# Altium PCB RDdengkuan - 副本 - 副本.PcbDoc (part 2 of 2)
Units mm, origin at the board's own origin, x right, y up, seen from the top; angles counter-clockwise.
Board outline 99.8 x 100 mm, 4 copper layers (Top Layer, VCC, GND, Bottom Layer); 147 components, 96 nets, 586 pads, 184 vias.
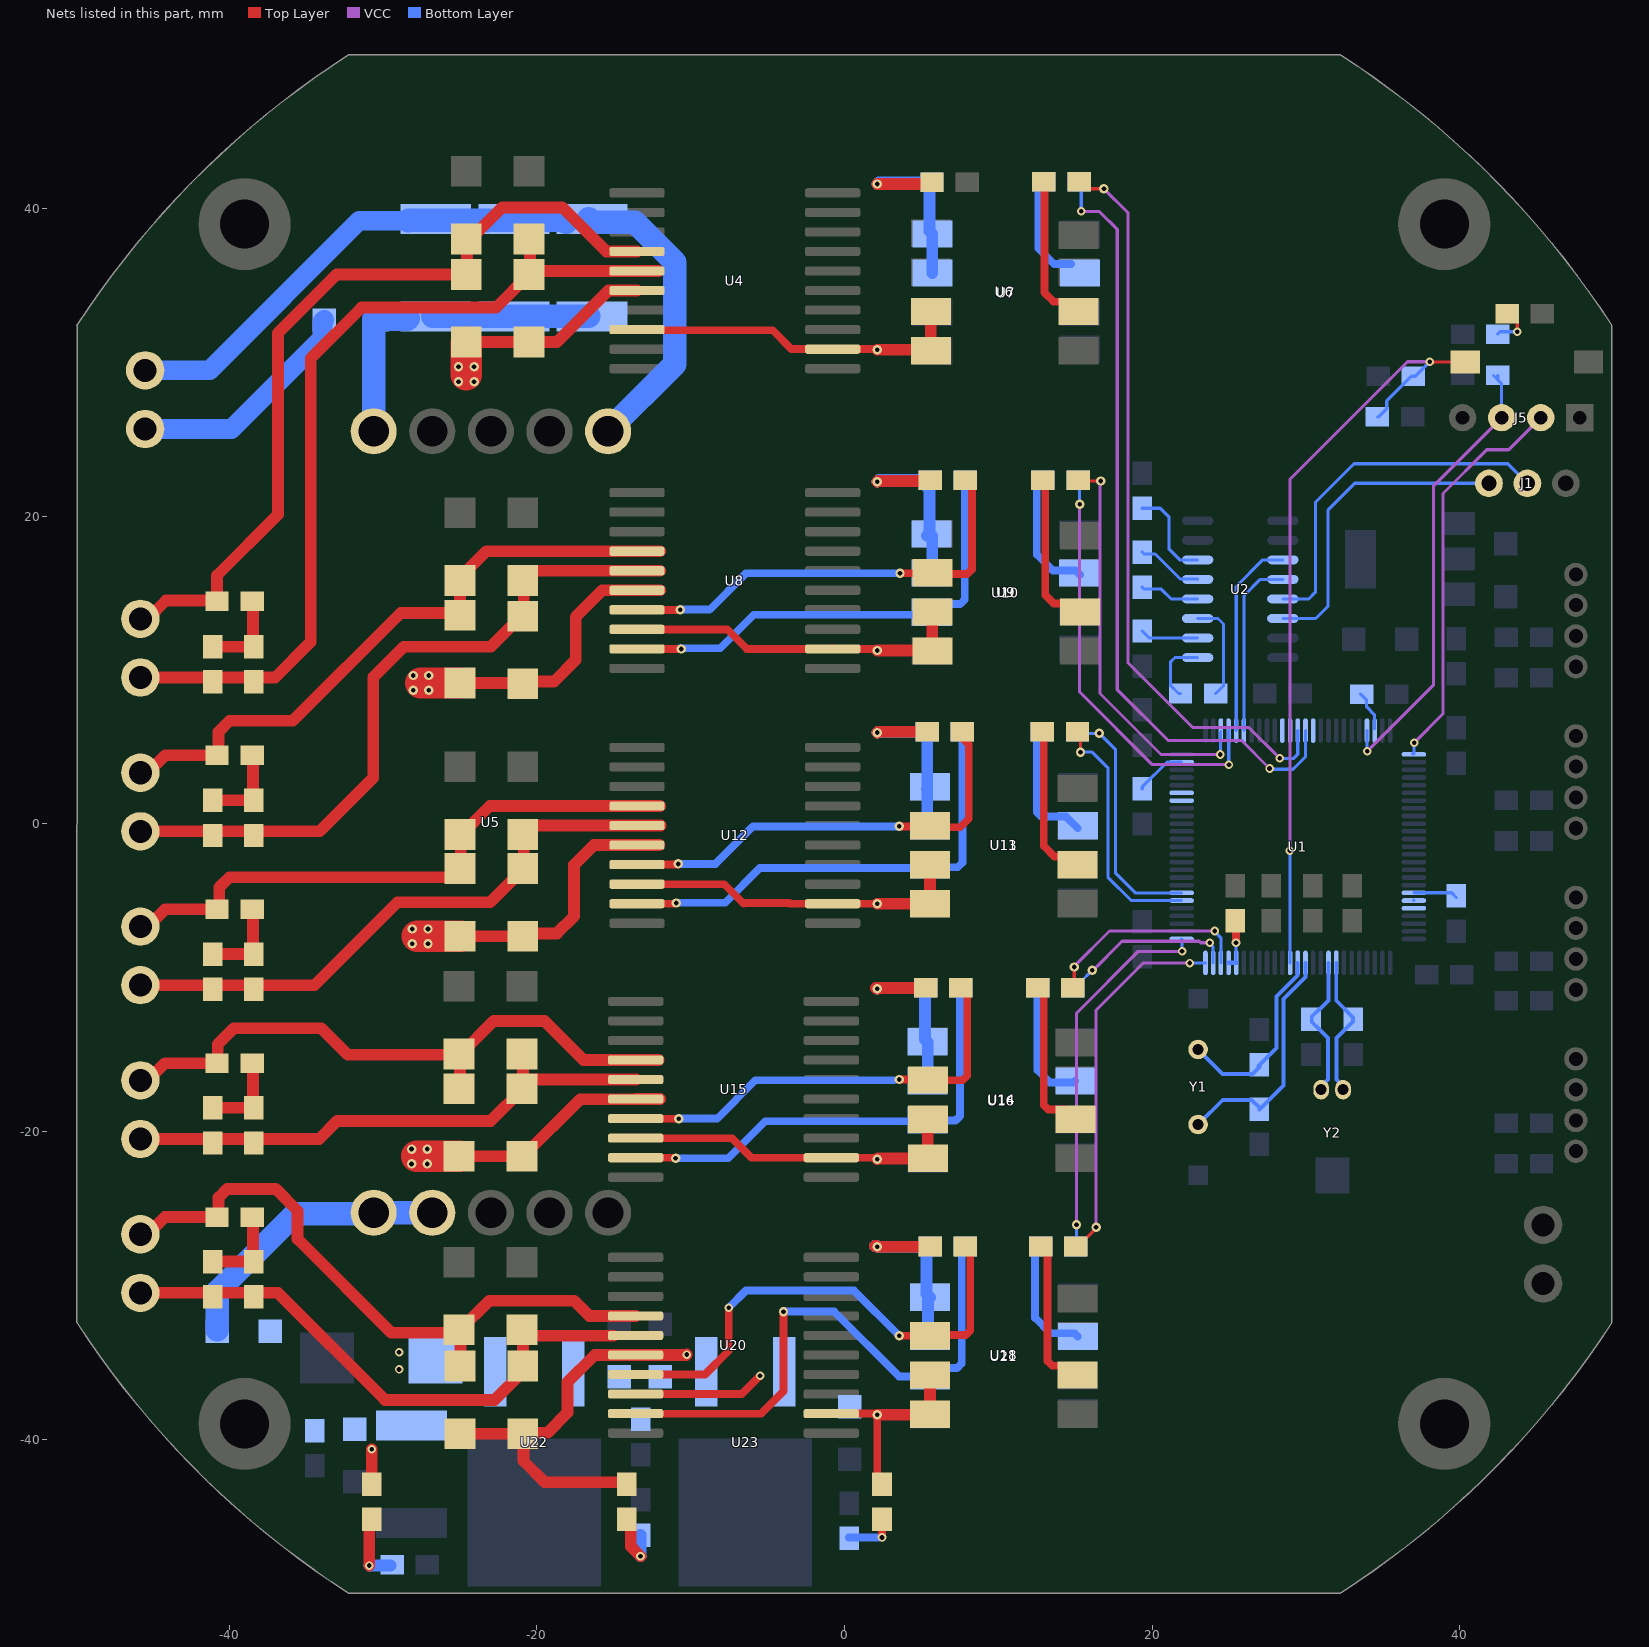
[diagram p4: the nets of this part, all layers, seen from the top]

## Via types
v1: diameter 0.559, hole 0.305, Top Layer to Bottom Layer, 112 vias
v2: diameter 0.61, hole 0.305, Top Layer to Bottom Layer, 72 vias

## Nets (pads, with @x,y where several pads share a name; then routed paths per layer and width w, separated by ;. In a path a pad name is that pad's centre, name@x,y a point inside that pad or via, vN(x,y) a via of type N, cw(c..) or ccw(c..) an arc to the next point about the centre after c; other vN are vias at no path point) (continued)
IN3: R17.2 U8.7 U9.6 | length 28.5
  Top Layer w0.508: U8.7@-13.491,13.925 -13.488,13.922 -10.671,13.922 v2(-10.668,13.919) ; v2(3.607,16.307) 5.654,16.307 5.711,16.249 7.983,16.249 8.28,16.546 R17.2@8.28,22.2
  Bottom Layer w0.508: v2@-10.637,13.923 -10.621,13.939 -8.769,13.939 -6.401,16.307 v2(3.607,16.307)
IN4: R20.2 U8.9 U10.6 | length 30.1
  Top Layer w0.508: U8.9@-13.491,11.385 -13.488,11.382 -10.62,11.382 v2(-10.617,11.379)
  Bottom Layer w0.508: v2@-10.766,11.43 -8.077,11.43 -5.9,13.607 U10.6@5.712,13.607 ; U10.6@5.712,13.658 6.348,14.294 7.518,14.294 7.816,14.592 R20.2@7.816,21.9
IN5: R22.2 U11.6 U12.7 | length 28.2
  Top Layer w0.508: U12.7@-13.491,-2.642 -10.847,-2.642 v2(-10.801,-2.596) ; v2(3.556,-0.152) 5.501,-0.152 5.559,-0.21 7.518,-0.21 8.077,0.348 8.077,5.164 7.696,5.545 R22.2@7.663,5.545
  Bottom Layer w0.508: v2@-10.792,-2.591 -8.382,-2.591 -5.944,-0.152 v2(3.556,-0.152)
IN6: R24.2 U12.9 U13.6 | length 30.7
  Top Layer w0.508: U12.9@-13.491,-5.182 -10.973,-5.182 v2(-10.93,-5.139)
  Bottom Layer w0.508: v2@-10.883,-5.119 -7.761,-5.119 -5.506,-2.865 U13.6@5.56,-2.865 ; U13.6@5.56,-2.814 7.366,-2.814 7.663,-2.516 R24.2@7.663,6.003
IN7: R27.2 U14.6 U15.7 | length 28.2
  Top Layer w0.508: U15.7@-13.542,-19.157 -10.775,-19.157 v2(-10.77,-19.152) ; v2@3.537,-16.631 v2(3.556,-16.612) 5.366,-16.612 5.415,-16.661 7.678,-16.661 7.976,-16.363 7.976,-11.181 7.595,-10.8 R27.2@7.519,-10.8
  Bottom Layer w0.508: v2(-10.77,-19.152) -8.28,-19.152 -5.791,-16.662 3.2,-16.662
IN8: R30.2 U15.9 U16.6 | length 30.4
  Top Layer w0.508: U15.9@-13.542,-21.697 -11.013,-21.697 v2(-10.981,-21.729)
  Bottom Layer w0.508: v2(-10.981,-21.729) -7.556,-21.729 -5.155,-19.328 U16.6@5.416,-19.328 ; U16.6@5.416,-19.277 7.222,-19.277 7.519,-18.98 R30.2@7.519,-10.8
IN9: R34.2 U18.6 U20.7 | length 32.7
  Top Layer w0.508: U20.7@-13.581,-35.79 -9.069,-35.79 -7.518,-34.239 v1(-7.518,-31.445) ; v2(3.556,-33.274) 5.554,-33.274 5.599,-33.229 7.881,-33.229 8.179,-32.931 R34.2@8.179,-27.847 ; R34.2@7.866,-27.466 7.95,-27.466 R34.2@8.331,-27.847
  Bottom Layer w0.508: v1(-7.518,-31.445) -6.401,-30.328 0.61,-30.328 v2(3.556,-33.274)
IN10: R36.2 U20.9 U21.6 | length 36.3
  Top Layer w0.508: U20.9@-13.581,-38.33 -13.569,-38.342 -5.424,-38.342 -3.962,-36.881 v2(-3.962,-31.699)
  Bottom Layer w0.508: v2(-3.962,-31.699) -0.66,-31.699 3.549,-35.908 U21.6@5.559,-35.908 ; U21.6@5.559,-35.858 6.056,-35.36 7.322,-35.36 7.62,-35.063 R36.2@7.62,-27.804
INPUT1: R13.1 U1.63 | length 48
  Top Layer w0.203: R13.1@15.591,41.231 15.661,41.3 v2(16.866,41.3)
  VCC w0.203: v2(16.866,41.3) 18.44,39.726 18.44,10.465 22.631,6.274 26.289,6.274 v1(28.296,4.267)
  Bottom Layer w0.203: v1(28.296,4.267) 29.21,4.267 29.469,4.526 U1.63@29.469,6.073
INPUT2: R16.1 U1.64 | length 50.8
  VCC w0.203: v1(15.392,39.827) 15.41,39.81 16.578,39.81 17.729,38.659 17.729,8.738 21.031,5.436 25.806,5.436 v1(27.635,3.607)
  Bottom Layer w0.203: R16.1@15.235,41.353 15.392,41.196 v1(15.392,39.827) ; v1(27.635,3.607) 27.686,3.556 29.159,3.556 29.969,4.366 U1.64@29.969,6.073
INPUT3: R18.1 U1.53 | length 26.3
  Top Layer w0.203: R18.1@15.189,22.357 15.245,22.301 v2(16.662,22.301)
  VCC w0.203: v2(16.662,22.301) 16.612,22.25 16.612,8.484 20.574,4.521 v1(24.435,4.521)
  Bottom Layer w0.203: v1(24.435,4.521) 24.452,4.538 24.452,5.985 U1.53@24.477,6.01
INPUT4: R21.1 U1.54 | length 27.2
  VCC w0.203: v2(15.291,20.777) 15.291,8.585 20.015,3.861 v1(24.994,3.861)
  Bottom Layer w0.203: v2(15.291,20.777) R21.1@15.291,21.9 ; U1.54@24.969,6.071 24.981,6.059 24.981,3.873 v1(24.994,3.861)
INPUT5: R23.1 U1.31 | length 15.6
  Top Layer w0.203: v2(15.342,4.674) 15.342,5.52 R23.1@15.367,5.545
  Bottom Layer w0.203: v2(15.342,4.674) 16.104,4.674 17.12,3.658 17.12,-3.454 18.642,-4.977 U1.31@21.919,-4.977
INPUT6: R26.1 U1.32 | length 15.7
  Bottom Layer w0.203: R26.1@15.367,5.545 15.714,5.893 v2(16.561,5.893) 17.628,4.826 17.628,-3.2 18.904,-4.476 U1.32@21.919,-4.476
INPUT7: R28.1 U1.23 | length 13.8
  Top Layer w0.203: v2(14.935,-9.296) 14.935,-10.394 R28.1@15.189,-10.648
  VCC w0.203: v2(14.935,-9.296) 14.935,-9.246 17.228,-6.953 v1(24.075,-6.953)
  Bottom Layer w0.203: v1(24.075,-6.953) 24.075,-6.992 24.469,-7.386 U1.23@24.469,-9.028
INPUT8: R31.1 U1.24 | length 11.5
  VCC w0.203: v2(16.104,-9.5) 16.164,-9.5 18.043,-7.62 23.055,-7.62 23.156,-7.722 v1(23.741,-7.722)
  Bottom Layer w0.203: R31.1@15.342,-10.826 15.342,-10.276 16.104,-9.514 v2(16.104,-9.5) ; v1(23.741,-7.722) 23.741,-7.776 23.969,-8.005 U1.24@23.969,-9.026
INPUT9: R35.1 U1.25 | length 24.5
  Top Layer w0.203: R35.1@15.037,-27.466 15.164,-27.466 16.358,-26.273 v2(16.358,-26.213)
  VCC w0.203: v2@16.435,-26.291 v2(16.358,-26.213) 16.358,-12.09 19.406,-9.042 v1(22.454,-9.042)
  Bottom Layer w0.203: v1(22.454,-9.042) 23.455,-9.042 U1.25@23.469,-9.026
INPUT10: R37.1 U1.26 | length 24.8
  VCC w0.203: v2@15.088,-26.187 v2(15.088,-26.06) 15.088,-12.294 19.101,-8.28 v1(21.946,-8.28)
  Bottom Layer w0.203: v2(15.088,-26.06) 15.088,-27.416 R37.1@15.037,-27.466 R37.1@15.111,-27.541 ; U1.26@21.919,-7.476 21.919,-7.495 21.946,-7.521 v1(21.946,-8.28)
INPUT_CeTui1: U1.95 | length 0
  Bottom Layer w0.203: U1.95@37.001,-4.958 U1.95@37.019,-4.977
INPUT_CeTui2: U1.96
INPUT_CeTui3: U1.44
INPUT_CeTui4: U1.45
INPUT_DuoJi1: U1.61
INPUT_DuoJi2: U1.62
INPUT_ZhuTui: U1.65
NetC8_2: C8.2 U1.49 | length 3.4
  Bottom Layer w0.203: C8.2@19.355,2.286 19.355,2.413 20.965,4.024 U1.49@21.919,4.024
NetC9_2: C9.2 U1.73 | length 2.6
  Bottom Layer w0.203: C9.2@33.553,8.433 33.942,8.044 33.942,7.612 34.451,7.104 U1.73@34.451,6.189
NetC11_1: C11.1 U2.3 | length 6.6
  Bottom Layer w0.203: U2.3@22.961,13.36 24.282,13.36 24.638,13.005 24.638,8.992 C11.1@24.13,8.484
NetC11_2: C11.2 U2.1 | length 4.3
  Bottom Layer w0.203: C11.2@21.844,8.484 21.717,8.484 21.184,9.017 21.184,10.516 21.488,10.82 U2.1@22.961,10.82
NetC14_1: C14.1 U2.2 | length 3.8
  Bottom Layer w0.203: C14.1@19.355,12.548 19.812,12.09 U2.2@22.961,12.09
NetC19_1: C19.1 U2.5 | length 4.3
  Bottom Layer w0.203: C19.1@19.355,17.678 19.482,17.551 20.193,17.551 21.821,15.923 22.938,15.923 U2.5@22.961,15.9
NetC19_2: C19.2 U2.4 | length 3.9
  Bottom Layer w0.203: C19.2@19.355,15.392 19.482,15.265 20.599,15.265 21.234,14.63 U2.4@22.961,14.63
NetC20_2: C20.2 U2.6 | length 6.2
  Bottom Layer w0.203: C20.2@19.355,20.523 20.523,20.523 21.107,19.939 21.107,17.856 21.793,17.17 U2.6@22.961,17.17
NetC23_1: C23.1 C24.1 C25.1 F1.2 U5.1 | length 19.7
  Bottom Layer w1.524: U5.1@-30.607,25.527 -30.607,32.817 -28.423,32.817 C25.1@-28.346,32.893 ; C25.1@-26.772,32.995 C23.1@-16.612,32.995
NetC23_2: C23.2 C24.2 C25.2 J9.1 U5.5 | length 51
  Bottom Layer w1.27: J9.1@-45.466,29.489 -41.275,29.489 -31.547,39.218 C25.2@-28.346,39.218
  Bottom Layer w1.524: C25.2@-28.346,39.218 -28.321,39.243 -23.292,39.243 -23.266,39.218 -23.241,39.243 -18.212,39.243 C23.2@-18.1,39.132 ; C23.2@-16.612,39.345 -16.399,39.132 -13.63,39.132 -11.024,36.525 -11.024,29.901 U5.5@-15.367,25.558
NetDS1_2: DS1.2 DS2.1 R14.1 | length 5.7
  Top Layer w0.762: DS2.1@-41.072,11.532 DS1.2@-38.405,11.532 -38.456,11.582 -38.456,14.427 R14.1@-38.506,14.478
NetDS3_2: DS3.2 DS4.1 R19.1 | length 5.6
  Top Layer w0.762: DS4.1@-41.072,1.537 DS3.2@-38.405,1.537 -38.456,1.587 -38.456,4.42 R19.1@-38.506,4.47
NetDS5_2: DS5.2 DS6.1 R25.1 | length 5.6
  Top Layer w0.762: DS6.1@-41.072,-8.458 DS5.2@-38.405,-8.458 -38.456,-8.407 -38.456,-5.588 R25.1@-38.506,-5.537
NetDS7_2: DS7.2 DS8.1 R32.1 | length 5.6
  Top Layer w0.762: DS8.1@-41.072,-18.453 DS7.2@-38.405,-18.453 -38.456,-18.402 -38.456,-15.596 R32.1@-38.506,-15.545
NetDS9_2: DS9.2 DS10.1 R38.1 | length 5.6
  Top Layer w0.762: DS10.1@-41.072,-28.448 DS9.2@-38.405,-28.448 -38.456,-28.397 -38.456,-25.603 R38.1@-38.506,-25.552
NetF1_1: F1.1 J9.2 | length 15.2
  Bottom Layer w1.27: J9.2@-45.466,25.679 -39.853,25.679 -33.934,31.598 -33.934,32.639 F1.1@-33.807,32.766
NetF2_1: F2.1 U5.9 U5.10 | length 18.6
  Bottom Layer w1.524: F2.1@-40.767,-32.868 -40.767,-30.404 -35.697,-25.334 -30.668,-25.334 U5.10@-30.607,-25.273 U5.9@-26.797,-25.273
NetLED1_1: LED1.1 R4.1 | length 2.8
  Top Layer w0.203: LED1.1@43.078,33.172 43.205,33.172 43.739,32.639 v1(43.739,32.004)
  Bottom Layer w0.203: R4.1@42.469,31.852 42.621,32.004 v1(43.739,32.004)
NetLED2_2: LED2.2 R29.1 | length 4.4
  Top Layer w0.762: v1(-30.886,-48.209) -30.886,-45.364 LED2.2@-30.734,-45.212
  Bottom Layer w0.762: v1(-30.886,-48.209) R29.1@-29.515,-48.209
NetLED3_2: LED3.2 R41.1 | length 4.2
  Top Layer w0.762: LED3.2@-14.308,-45.23 -14.257,-45.23 -13.894,-45.593 -13.894,-46.965 v1(-13.259,-47.6)
  Bottom Layer w0.762: v1(-13.259,-47.6) R41.1@-13.259,-46.228
NetLED4_2: LED4.2 R42.1 | length 3.3
  Top Layer w0.508: v1(2.438,-46.38) LED4.2@2.438,-45.212
  Bottom Layer w0.508: R42.1@0.279,-46.38 v1(2.438,-46.38)
NetR2_1: R2.1 U1.94 | length 2.9
  Bottom Layer w0.203: U1.94@37.025,-4.47 39.472,-4.47 R2.1@39.776,-4.775
NetR13_2: R13.2 U6.2 | length 9.6
  Top Layer w0.508: R13.2@13.005,41.404 13.005,34.544 13.595,33.954 14.574,33.954 U6.2@15.21,33.318
NetR16_2: R16.2 U7.2 | length 6.7
  Bottom Layer w0.508: R16.2@12.598,41.605 12.598,37.44 13.639,36.399 U7.2@14.733,36.399
NetR18_2: R18.2 U9.2 | length 10.2
  Top Layer w0.508: R18.2@12.903,22.357 13.056,22.205 13.056,14.884 13.607,14.333 14.764,14.333 U9.2@15.312,13.785
NetR21_2: R21.2 U10.2 | length 8.4
  Bottom Layer w0.508: R21.2@12.903,22.357 12.878,22.357 12.497,21.976 12.497,17.526 13.548,16.475 15.035,16.475 U10.2@15.312,16.198
NetR23_2: R23.2 U11.2 | length 9.7
  Top Layer w0.508: R23.2@12.954,5.545 12.954,-1.422 13.646,-2.114 14.523,-2.114 U11.2@15.159,-2.75
NetR26_2: R26.2 U13.2 | length 7.9
  Bottom Layer w0.508: R26.2@12.497,5.545 12.497,0.778 12.794,0.481 14.405,0.481 U13.2@15.16,-0.274
NetR28_2: R28.2 U14.2 | length 9.9
  Top Layer w0.508: R28.2@12.954,-10.8 12.954,-18.267 13.252,-18.565 14.379,-18.565 U14.2@15.015,-19.201
NetR31_2: R31.2 U16.2 | length 8.2
  Bottom Layer w0.508: R31.2@12.556,-10.648 12.556,-16.011 13.346,-16.801 14.899,-16.801 U16.2@14.986,-16.713
NetR35_2: R35.2 U18.2 | length 10
  Top Layer w0.508: R35.2@12.751,-27.466 12.827,-27.466 13.208,-27.847 13.208,-34.926 13.506,-35.223 14.664,-35.223 U18.2@15.21,-35.769
NetR37_2: R37.2 U21.2 | length 8.1
  Bottom Layer w0.508: R37.2@12.646,-27.381 12.395,-27.632 12.395,-32.106 13.395,-33.105 14.947,-33.105 U21.2@15.159,-33.318
OSC32IN: C17.2 U1.8 Y2.1 | length 9.3
  Bottom Layer w0.254: U1.8@31.969,-9.026 31.969,-11.472 33.071,-12.573 33.071,-12.827 31.979,-13.919 31.979,-16.615 32.41,-17.047 Y2.1@32.41,-17.272
OSC32OUT: C18.2 U1.9 Y2.2 | length 9.4
  Bottom Layer w0.254: Y2.2@30.988,-17.272 30.988,-17.072 31.445,-16.615 31.445,-13.919 30.861,-13.335 30.836,-13.335 30.378,-12.878 30.378,-12.522 30.836,-12.065 30.886,-12.065 31.469,-11.482 U1.9@31.469,-9.026
OSCIN: C15.2 U1.12 Y1.1 | length 15.8
  Bottom Layer w0.254: Y1.1@22.987,-19.536 24.59,-17.932 26.467,-17.932 26.975,-18.44 26.975,-18.567 28.55,-16.993 28.55,-11.379 29.969,-9.96 U1.12@29.969,-9.026
OSCOUT: C16.2 U1.13 Y1.2 | length 12.6
  Bottom Layer w0.254: Y1.2@22.987,-14.656 24.587,-16.256 26.518,-16.256 C16.2@26.975,-15.799 ; C16.2@26.924,-15.723 28.092,-14.554 28.092,-11.227 29.46,-9.859 29.46,-9.035 U1.13@29.469,-9.026
OUT1: D1.2 D3.1 J10.1 R14.2 U4.4 | length 53.6
  Top Layer w0.762: J10.1@-45.771,13.335 -45.301,13.335 -44.107,14.529 -40.843,14.529 R14.2@-40.792,14.478 -40.792,16.154 -36.83,20.117 -36.83,31.902 -33.005,35.728 D1.2@-24.595,35.728 ; D1.2@-24.536,35.728 D3.1@-24.536,38.034 ; D3.1@-24.355,37.983 -22.256,40.081 -18.339,40.081 -15.478,37.221 U4.4@-13.491,37.221
OUT2: D2.2 D4.1 DS1.1 DS2.2 J10.2 U4.5 | length 57.2
  Top Layer w0.762: J10.2@-45.771,9.525 -41.072,9.525 -37.008,9.525 -34.696,11.836 -34.696,30.277 -31.394,33.579 -22.651,33.579 D2.2@-20.502,35.728 ; D4.1@-20.85,37.65 D4.1@-20.472,38.027 ; D2.2@-20.504,35.951 U4.5@-13.491,35.951 U4.5@-12.09,35.951 ; D2.2@-20.443,36.347 D4.1@-20.443,37.701
OUT3: D5.2 D7.1 J11.1 R19.2 U8.4 | length 42
  Top Layer w0.762: J11.1@-45.771,3.334 -45.301,3.334 -44.164,4.47 R19.2@-40.792,4.47 -40.691,4.572 -40.691,5.994 -39.98,6.706 -35.865,6.706 -28.854,13.716 -25.001,13.716 D7.1@-25.001,15.935 ; D7.1@-25.074,15.935 -23.274,17.735 U8.4@-13.491,17.735 U8.4@-11.989,17.735
OUT4: D6.2 D8.1 DS3.1 DS4.2 J11.2 U8.5 | length 45.7
  Top Layer w0.762: J11.2@-45.771,-0.476 -41.072,-0.476 -38.405,-0.476 -34.106,-0.476 -30.632,2.997 -30.632,9.55 -28.651,11.532 -22.983,11.532 -20.85,13.665 D8.1@-20.85,15.935 ; D8.1@-20.777,16.465 U8.5@-13.491,16.465 U8.5@-11.989,16.465
OUT5: D9.2 D11.1 J12.1 R25.2 U12.4 | length 39
  Top Layer w0.762: J12.1@-45.771,-6.667 -45.301,-6.667 -44.17,-5.537 R25.2@-40.792,-5.537 -40.64,-5.385 -40.64,-4.115 -39.98,-3.454 -25.56,-3.454 D9.2@-25.001,-2.896 ; D9.2@-24.943,-2.896 -24.943,-0.728 -23.047,1.168 U12.4@-13.491,1.168 U12.4@-11.989,1.168
OUT6: D10.2 D12.1 DS5.1 DS6.2 J12.2 U12.5 | length 39.4
  Top Layer w0.762: J12.2@-45.771,-10.477 -41.072,-10.477 -38.405,-10.477 -34.455,-10.477 -29.058,-5.08 -23.034,-5.08 -20.85,-2.896 -20.85,-0.778 -20.173,-0.102 U12.5@-13.491,-0.102 U12.5@-11.938,-0.102
OUT7: D13.2 D15.1 J14.1 R32.2 U15.4 | length 40.6
  Top Layer w0.762: J14.1@-45.771,-16.669 -45.301,-16.669 -44.177,-15.545 R32.2@-40.792,-15.545 -40.742,-15.494 -40.742,-14.326 -39.7,-13.284 -34.011,-13.284 -32.292,-15.002 D15.1@-24.994,-15.002 ; D13.2@-24.994,-17.206 D15.1@-24.994,-15.002 ; U15.4@-12.09,-15.342 -13.536,-15.342 -13.542,-15.347 -16.962,-15.347 -19.507,-12.802 -22.793,-12.802 D15.1@-24.994,-15.002
OUT8: D14.2 D16.1 DS7.1 DS8.2 J14.2 U15.5 | length 36
  Top Layer w0.762: J14.2@-45.771,-20.479 -41.072,-20.479 -38.405,-20.479 -34.144,-20.479 -32.969,-19.304 -22.999,-19.304 -20.9,-17.206 D16.1@-20.9,-15.002 ; D14.2@-20.875,-17.211 -20.281,-16.617 U15.5@-13.542,-16.617
OUT9: D18.2 D20.1 J15.1 R38.2 U20.4 | length 42.5
  Top Layer w0.762: J15.1@-45.771,-26.67 -45.301,-26.67 -44.183,-25.552 R38.2@-40.792,-25.552 -40.691,-25.451 -40.691,-24.282 -40.132,-23.724 -36.982,-23.724 -35.56,-25.146 -35.56,-26.975 -29.464,-33.071 -24.943,-33.071 -24.968,-33.096 -24.968,-35.214 D18.2@-24.943,-35.24 ; D20.1@-24.994,-32.883 -23.099,-30.988 -17.577,-30.988 -16.585,-31.98 U20.4@-13.581,-31.98
OUT10: D19.2 D21.1 DS9.1 DS10.2 J15.2 U20.5 | length 37
  Top Layer w0.762: J15.2@-45.771,-30.48 -36.83,-30.48 -29.87,-37.44 -22.745,-37.44 -20.9,-35.595 D21.1@-20.9,-33.274 ; D21.1@-20.959,-32.883 -20.568,-33.274 U20.5@-15,-33.274
RST: C21.1 K1.1 R3.1 U1.14 | length 51
  Top Layer w0.203: v1@38.303,29.972 38.354,30.023 K1.1@40.362,30.023
  VCC w0.203: v1(28.956,-1.727) 28.963,-1.721 28.963,22.409 36.601,30.048 v1(38.049,30.048)
  Bottom Layer w0.203: v1(28.956,-1.727) 28.963,-1.734 28.963,-9.022 U1.14@28.969,-9.026 ; R3.1@34.646,26.467 34.722,26.467 35.255,27 35.255,27.508 36.855,29.108 37.109,29.108 v1(38.049,30.048) v1@38.049,30.074
RXA: J1.2 U2.13 | length 23.5
  Bottom Layer w0.203: U2.13@28.499,14.63 30.175,14.63 30.632,15.088 30.632,20.93 33.122,23.419 43.129,23.419 J1.2@44.399,22.149
RXD: U1.56 U2.12 | length 11.7
  Bottom Layer w0.203: U1.56@25.969,6.073 25.969,14.834 27.036,15.9 U2.12@28.499,15.9
SWCLK: J5.2 U1.76 | length 26.2
  VCC w0.203: v1(37.033,5.283) 38.913,7.163 38.913,21.488 41.758,24.333 43.18,24.333 J5.2@45.263,26.416
  Bottom Layer w0.203: U1.76@36.932,4.568 37.033,4.568 v1(37.033,5.283)
SWDIO: J5.3 R11.1 U1.72 | length 30.3
  VCC w0.203: v1(33.985,4.724) 38.303,9.042 38.303,21.996 J5.3@42.723,26.416
  Bottom Layer w0.203: U1.72@33.969,6.071 33.977,6.064 33.977,4.732 v1(33.985,4.724) ; R11.1@42.189,29.159 R11.1@42.723,28.626 ; R11.1@42.469,29.159 42.469,28.88 R11.1@42.723,28.626 ; J5.3@42.723,26.416 R11.1@42.723,28.626
TXA: J1.3 U2.14 | length 20.7
  Bottom Layer w0.203: U2.14@28.499,13.36 30.632,13.36 31.445,14.173 31.445,20.422 33.172,22.149 J1.3@41.899,22.149
TXD: U1.55 U2.11 | length 13.1
  Bottom Layer w0.203: U1.55@25.469,6.073 25.469,15.443 27.196,17.17 U2.11@28.499,17.17
VCC_5V: C32.1 LED4.1 R12.1 R15.1 R17.1 R20.1 R22.1 R24.1 R27.1 R30.1 R34.1 R36.1 U4.8 U4.12 U6.7 U6.8 U7.7 U7.8 U8.8 U8.12 U9.7 U9.8 U10.7 U10.8 U11.7 U11.8 U12.8 U12.12 U13.7 U13.8 U14.7 U14.8 U15.8 U15.12 U16.7 U16.8 U18.7 U18.8 U20.8 U20.12 U21.7 U21.8 U23.3 | length 173.9
  Top Layer w0.508: U15.8@-13.542,-20.427 -7.31,-20.427 -6.045,-21.692 2.005,-21.692 2.106,-21.793 v2(2.134,-21.793) ; U20.8@-13.533,-37.06 -6.682,-37.06 v1(-5.486,-35.865) ; U12.8@-13.491,-3.912 -7.823,-3.912 -6.553,-5.182 ; U8.8@-13.491,12.655 -7.625,12.655 -6.355,11.385 U8.12@-0.769,11.385 ; U4.8@-13.445,32.095 -4.663,32.095 -3.439,30.871 U4.12@-1.218,30.871 ; -6.604,-5.131 -3.585,-5.131 -3.534,-5.182 v2(2.134,-5.182) ; U4.12@-1.218,30.878 2.063,30.878 2.106,30.836 v2(2.134,30.836) ; U8.12@-0.769,11.431 -0.723,11.385 1.999,11.385 2.106,11.278 v2(2.134,11.278) ; U4.12@-0.769,30.871 U4.12@-0.761,30.878 ; U20.12@-0.762,-38.33 2.032,-38.33 2.106,-38.405 v2(2.134,-38.405) 2.134,-42.621 LED4.1@2.438,-42.926
  Top Layer w0.762: v2@1.981,-27.432 2.083,-27.432 v2(2.134,-27.483) R34.1@5.489,-27.483 ; v2@2.032,-10.668 2.083,-10.668 v2(2.134,-10.719) ; v2(2.134,-38.405) U18.8@5.552,-38.405 ; v2(2.134,-21.793) 2.184,-21.742 U14.8@5.299,-21.742 ; v2@2.134,-10.668 R27.1@5.05,-10.668 ; v2(2.134,-5.182) U11.8@5.392,-5.182 ; v2(2.134,5.944) 2.184,5.994 R22.1@5.525,5.994 ; v2(2.134,11.278) 5.679,11.278 U9.8@5.711,11.245 U9.7@5.711,13.709 ; v2(2.134,22.25) 2.184,22.301 R17.1@5.128,22.301 ; v2(2.134,30.836) 5.552,30.836 U6.8@5.61,30.778 U6.7@5.61,33.318 ; v2(2.134,41.605) 5.106,41.605 R12.1@5.258,41.453 ; U18.7@5.146,-35.458 5.559,-35.872 U18.8@5.559,-38.361 ; U14.8@5.415,-21.724 U14.7@5.415,-19.184 ; U11.8@5.559,-5.189 U11.7@5.559,-2.649
  Bottom Layer w0.762: v2@1.981,-27.432 2.083,-27.432 v2(2.134,-27.483) 5.276,-27.483 R36.1@5.479,-27.686 ; v2(2.134,-10.719) 2.204,-10.648 R30.1@5.284,-10.648 ; v2(2.134,5.944) 2.184,5.994 4.869,5.994 R24.1@5.377,5.486 ; v2(2.134,22.25) 2.24,22.357 R20.1@5.58,22.357 ; v2(2.134,41.605) 2.237,41.708 R15.1@5.691,41.708 ; R30.1@5.304,-10.77 5.233,-10.84 5.233,-14.015 5.416,-14.197 U16.7@5.416,-16.737 ; R36.1@5.326,-27.686 5.326,-30.545 U21.8@5.559,-30.778 ; R20.1@5.334,21.946 R20.1@5.436,21.844 ; U10.8@5.347,18.738 5.53,18.92 R20.1@5.53,21.801 ; U13.8@5.357,2.286 U13.8@5.377,2.266 ; R24.1@5.377,5.545 U13.8@5.377,2.266 ; U21.8@5.428,-30.778 5.428,-33.187 U21.7@5.559,-33.318 ; R15.1@5.53,41.402 5.53,38.542 5.712,38.36 U7.7@5.712,35.82 ; U13.7@5.56,-0.274 5.377,-0.091 U13.8@5.377,2.266 ; U10.8@5.681,18.707 5.712,18.738 U10.7@5.712,16.198
VCC_12V: C28.2 C30.1 C31.1 D18.1 D19.1 LED3.1 U20.6 U22.3 U23.1 | length 27.1
  Top Layer w0.762: D18.1@-24.943,-39.639 D19.1@-20.908,-39.639 D19.1@-20.868,-39.639 ; D19.1@-20.879,-39.573 -20.868,-39.584 D19.1@-20.868,-39.639 ; D19.1@-20.834,-39.624 -20.783,-39.573 -19.304,-39.573 -18.009,-38.278 -18.009,-36.297 -16.232,-34.52 -10.289,-34.52 v1(-10.262,-34.493) ; LED3.1@-14.148,-42.926 -14.275,-42.799 -19.482,-42.799 -20.868,-41.413 D19.1@-20.868,-39.639
VCC_24V: C26.1 C27.2 C29.1 D1.1 D2.1 D5.1 D6.1 D9.1 D10.1 D13.1 D14.1 F2.2 LED2.1 TVS1.2 U4.6 U8.6 U12.6 U15.6 U22.1 | length 76.5
  Top Layer w0.762: LED2.1@-30.734,-42.926 v1(-30.734,-40.64) ; D5.1@-25.001,9.164 D6.1@-20.959,9.164 ; D13.1@-24.994,-21.605 D14.1@-20.959,-21.605 -20.9,-21.605 -17.182,-17.887 -13.542,-17.887 -13.536,-17.882 U15.6@-11.989,-17.882 ; D9.1@-24.943,-7.295 D10.1@-20.908,-7.295 -20.85,-7.295 -20.666,-7.112 -18.694,-7.112 -17.577,-5.994 -17.577,-2.642 -16.307,-1.372 U12.6@-13.491,-1.372 U12.6@-12.04,-1.372 ; D1.1@-24.536,31.328 D2.1@-20.502,31.328 -18.71,31.328 -15.357,34.681 U4.6@-13.491,34.681 ; D6.1@-20.85,9.265 -18.878,9.265 -17.475,10.668 -17.475,13.462 -15.743,15.195 U8.6@-13.491,15.195 U8.6@-11.989,15.195
  Top Layer w2.032: -27.823,-21.605 D13.1@-25.052,-21.605 D13.1@-24.994,-21.605 ; -27.772,-7.295 D9.1@-25.001,-7.295 D9.1@-24.943,-7.295 ; -27.565,9.164 -26.537,9.164 D5.1@-25.001,9.164 -27.553,9.164 ; D1.1@-24.595,31.328 -24.595,29.195 -24.587,29.202
  other v1: -28.956,-35.458 -28.956,-34.341
  other v2: -28.143,-22.098 -27.127,-22.098 -28.143,-21.133 -27.127,-21.133 -28.092,-7.788 -27.076,-7.788 -28.092,-6.823 -27.076,-6.823 -28.042,8.687 -27.026,8.687 -28.042,9.652 -27.026,9.652 -25.095,28.753 -24.079,28.753 -25.095,29.718 -24.079,29.718
VDD: R1.1 U1.21 U1.22 | length 3.4
  Top Layer w0.203: R1.1@25.349,-6.147 R1.1@25.451,-6.248
  Top Layer w0.508: v1(25.451,-7.722) R1.1@25.451,-6.248
  Bottom Layer w0.203: v1(25.451,-7.722) 25.46,-7.731 25.46,-9.019 U1.21@25.469,-9.026
  Bottom Layer w0.305: U1.22@24.969,-9.026 U1.21@25.469,-9.026
pads on no net: U1.1 U1.2 U1.3 U1.4 U1.5 U1.7 U1.15 U1.16 U1.17 U1.18 U1.29 U1.30 U1.33 U1.34 U1.35 U1.36 U1.37 U1.38 U1.39 U1.40 U1.41 U1.42 U1.43 U1.46 U1.47 U1.48 U1.51 U1.52 U1.57 U1.58 U1.59 U1.60 U1.66 U1.69 U1.70 U1.71 U1.78 U1.79 U1.80 U1.81 U1.82 U1.83 U1.84 U1.85 U1.86 U1.87 U1.88 U1.97 U1.98 U2.7 U2.8 U2.9 U2.10 U4.3 U4.13 U4.14 U4.15 U4.16 U4.17 U4.18 U5.2 U5.3 U5.4 U5.8 U6.1 U6.4 U7.1 U7.4 U8.3 U8.13 U8.14 U8.15 U8.16 U8.17 U8.18 U9.1 U9.4 U10.1 U10.4 U11.1 U11.4 U12.3 U12.13 U12.14 U12.15 U12.16 U12.17 U12.18 U13.1 U13.4 U14.1 U14.4 U15.3 U15.13 U15.14 U15.15 U15.16 U15.17 U15.18 U16.1 U16.4 U18.1 U18.4 U20.3 U20.13 U20.14 U20.15 U20.16 U20.17 U20.18 U21.1 U21.4 Y1. Y2.
copper on no net:
  other v1: 28.905,-43.485 28.905,-41.097 31.09,-41.097

## Polygon pours and split planes (outlines as drawn)
GND2 on GND "GND-GND2" (solid, remove dead copper, pour order 128): -28.603,-48.816 -27.635,-49.784 3.658,-49.784 8.839,-44.602 8.839,44.959 2.881,49.378 -24.601,49.378 -26.822,46.12 -26.822,-34.905 -28.296,-36.271 -35.408,-36.271 -35.408,-44.806 -28.603,-46.939
GND1 on GND "GND-GND1" (solid, pour order 175): 11.024,-41.156 12.888,-43.712 18.859,-43.712 33.343,-33.426 46.301,-33.426 49.575,-30.624 49.575,0.254 49.575,31.132 46.301,33.934 33.343,33.934 18.859,44.22 12.888,44.22 11.024,41.664 11.024,0.254
VCC_24V on VCC "VCC-VCC_24V" (solid, pour order 155): -36.609,-28.992 -29.338,-36.17 -28.531,-36.17 -28.227,-35.865 -28.227,-34.142 -34.493,-27.876 -34.493,-22.909 -34.069,-22.606 -26.891,-22.606 -26.351,-22.186 -26.351,-20.856 -26.79,-20.472 -34.069,-20.472 -34.493,-20.048 -34.493,-9.1 -33.416,-8.331 -26.866,-8.331 -26.351,-7.931 -26.351,-6.731 -26.844,-6.299 -33.528,-6.299 -34.493,-5.335 -34.493,7.671 -33.64,8.28 -26.866,8.28 -26.338,8.691 -26.338,9.908 -26.801,10.312 -33.782,10.312 -34.493,11.023 -34.493,27.176 -33.596,28.143 -23.952,28.143 -23.47,28.406 -23.47,30.007 -23.952,30.226 -34.526,30.226 -36.609,28.143
VCC_5V on VCC "VCC-VCC_5V" (solid, pour order 157): 1.829,-39.065 2.388,-39.065 2.692,-38.76 2.692,-38.278 2.692,40.767 2.54,40.919 1.778,40.919 1.62,40.761 1.519,-38.756
VCC_24V on Bottom Layer "Bottom Layer-VCC_24V" (solid, pour order 167): -36.627,-33.833 -36.424,-33.63 -36.424,-32.156 -35.916,-31.648 -31.242,-31.648 -29.667,-33.223 -29.667,-34.188 -29.661,-34.188 -29.661,-37.418 -30.021,-37.998 -32.27,-37.998 -32.822,-38.551 -35.004,-38.551 -35.204,-38.77 -35.204,-40.132 -35.058,-40.278 -31.937,-40.278 -31.953,-40.284 -31.242,-40.996 -30.378,-40.996 -29.661,-40.278 -25.819,-40.278 -25.654,-40.055 -25.654,-38.379 -25.327,-37.998 -22.081,-37.998 -21.844,-37.795 -21.844,-33.332 -23.92,-32.868 -21.844,-33.332 -30.582,-29.972 -36.22,-29.972 -38.252,-32.004 -38.252,-33.68 -38.1,-33.833
GND2 on Bottom Layer "Bottom Layer-GND2" (solid, remove dead copper, pour order 142): -11.836,-45.212 -11.836,-49.252 -11.464,-49.682 -1.724,-49.682 -1.473,-49.327 -1.473,-45.349 -0.914,-44.958 0.998,-44.958 1.27,-44.611 1.27,-40.843 0.872,-39.845 -2.07,-39.845 -10.73,-39.811 -11.1,-40.234 -15.229,-40.234 -16,-39.671 -24.539,-39.671 -24.79,-39.994 -24.79,-43.422 -25.857,-44.214 -30.429,-44.214 -31.009,-41.91 -33.378,-41.91 -33.782,-40.792 -35.154,-40.792 -35.408,-41.046 -35.408,-42.723 -30.429,-46.584 -28.702,-46.584 -28.042,-47.041 -28.042,-48.819 -24.961,-49.682 -15.652,-49.682 -15.189,-49.077 -15.189,-45.064 -14.58,-44.856 -12.395,-44.856
GND2 on Bottom Layer "Bottom Layer-GND2 1" (solid, remove dead copper, pour order 119): -11.227,-33.477 -11.004,-33.255 -11.004,-31.778 -13.252,-24.344 -14.255,-23.34 -20.666,-23.34 -21.176,-23.772 -21.176,-27.321 -15.596,-31.418 -15.596,-33.274 -15.392,-33.477
VCC_12V on Bottom Layer "Bottom Layer-VCC_12V" (solid, pour order 146): -14.072,-39.313 -13.824,-39.624 -12.719,-39.624 -12.447,-39.352 -12.447,-38.276 -11.782,-37.948 -8.306,-37.948 -8.077,-37.795 -8.077,-33.272 -9.701,-33.272 -11.481,-35.052 -16.303,-35.052 -16.748,-34.259 -16.748,-33.401 -16.898,-33.176 -18.326,-33.176 -18.475,-33.325 -18.475,-37.719 -18.292,-37.948 -14.583,-37.948 -14.072,-38.351
VCC_5V on Bottom Layer "Bottom Layer-VCC_5V" (solid, pour order 165): -4.928,-37.744 -4.674,-37.998 -3.099,-37.998 0.671,-39.065 1.478,-39.065 2.438,-39.065 2.692,-38.811 2.692,-38.202 2.489,-37.998 1.422,-36.932 0.14,-36.932 -2.642,-34.429 -2.946,-34.124 -2.946,-33.464 -3.238,-33.172 -4.623,-33.172 -4.928,-33.477 -4.928,-35.096 -6.147,-35.414 -6.147,-36.156 -4.928,-36.462
GND1 on Top Layer "Top Layer-GND1" (solid, pour order 174): 11.024,-41.207 12.888,-43.763 18.859,-43.763 33.343,-33.477 46.301,-33.477 49.575,-30.675 49.575,0.203 49.575,31.082 46.301,33.884 33.343,33.884 18.859,44.169 12.888,44.169 11.024,41.613 11.024,0.203

## Other copper
Top Layer:
  pour cut-out: 43.332,-24.028 43.332,-28.092 47.396,-28.092 47.396,-24.028
  pour cut-out: 40.112,27.686 46.533,27.686 46.66,27.559 46.66,25.273 46.511,25.124 40.112,25.124
  pour cut-out: 41.899,23.441 44.399,23.441 44.421,23.419 46.452,23.419 46.598,23.273 45.779,22.454 45.767,22.454 45.767,21.85 46.592,21.025 46.583,21.025 46.416,20.857 41.899,20.857
  pour cut-out: 16.84,3.454 12.802,3.454 12.802,7.01 16.84,7.01
  pour cut-out: 16.993,19.863 14.326,19.863 14.326,23.368 16.993,23.368
  pour cut-out: 16.916,39.522 13.614,39.522 13.614,42.774 16.916,42.774
GND:
  pour cut-out: 43.332,-24.079 43.332,-28.143 47.396,-28.143 47.396,-24.079
  pour cut-out: 30.123,-16.295 33.325,-16.295 33.325,-24.079 30.175,-24.079 30.124,-24.13 30.123,-24.129
  pour cut-out: 21.747,-10.566 24.232,-10.566 24.232,-11.481 24.181,-11.532 25.353,-12.704 25.4,-12.704 25.502,-21.32 24.243,-22.579 24.243,-23.763 24.232,-23.774 21.793,-23.774 21.793,-22.681 21.806,-22.667 20.472,-21.333 20.472,-12.704 20.524,-12.704 21.747,-11.481
  pour cut-out: -26.975,36.473 -22.911,30.509 -22.911,23.777 -26.975,18.948 -26.975,21.742
  pour cut-out: -17.691,27.889 -17.691,22.911 -12.891,22.911 -12.891,27.889
  pour cut-out: -27.358,11.632 -25.986,10.261 -25.986,7.67 -26.037,7.67 -27.434,6.781 -27.358,6.857 -27.358,11.988
  pour cut-out: -27.229,-4.902 -25.857,-6.274 -25.857,-8.865 -25.908,-8.865 -27.305,-9.754 -27.229,-9.677 -27.229,-4.547
  pour cut-out: -27.28,-19.253 -22.911,-23.622 -22.911,-27.054 -27.28,-31.719 -27.28,-29.007
  pour cut-out: 40.183,27.697 46.522,27.697 46.66,27.559 46.66,25.273 46.522,25.135 40.183,25.135
  pour cut-out: 41.899,23.441 44.399,23.441 44.421,23.419 46.452,23.419 46.598,23.273 45.779,22.454 45.767,22.454 45.767,21.85 46.592,21.025 46.583,21.025 46.416,20.857 41.899,20.857
Bottom Layer:
  pour cut-out: -25.287,-38.553 -25.271,-38.548 -25.287,-38.551

## Silkscreen, mask and mechanical layers (free items; w line width, h text height)
Top Overlay:
  text "3.3+" at 38.456,33.02 h0.76
  text "-" at -41.758,31.128 h1.14
  text "Load" at 34.765,26.822 h0.76
  text "3.3-DIO-CLK-GND" at 26.626,25.654 h0.76
  text "232" at 35.781,23.368 h0.76
  text "+" at -41.859,22.873 h1.14
  text "T-R-G" at 35.053,21.844 h0.76
  text "24V" at -49.225,21.59 h1.14
  text "Jian" at 41.402,16.967 h0.76
  text "Jian+" at -49.771,15.73 h0.76
  text "A-B-V-G" at 44.298,10.363 h0.76 r90
  text "DaBi" at 41.554,6.655 h0.76
  text "Dabi+" at -49.771,5.729 h0.76
  text "XiaoBi" at 40.081,-3.861 h0.76
  text "Xiaobi+" at -49.872,-4.33 h0.76
  text "Wan" at -49.771,-14.274 h0.76
  text "Wan" at 41.91,-14.326 h0.76
  text "Zhua+" at -49.771,-24.275 h0.76
  text "5V+" at 41.91,-26.822 h1.14 r90
  text "24+" at -28.905,-43.332 h0.76
  text "12+" at -12.192,-43.332 h0.76
  text "5+" at 4.216,-43.332 h0.76
  text "zkk2/4" at 30.48,-45.568 h0.76
Bottom Overlay:
  text "+" at -20.218,34.214 h0.76
  text "+" at -15.088,34.214 h0.76
  text "+" at -25.197,34.112 h0.76
  text "+" at 43.993,13.183 h0.76
  text "+" at 37.541,12.725 h0.76
  text "+" at -24.79,-31.572 h0.76 r180
  text "+" at -0.711,-36.297 h0.76 r180
  text "+" at -10.465,-36.805 h0.76 r180
  text "+" at -15.646,-36.855 h0.76 r180
  text "+" at -25.654,-38.176 h0.76
  text "+" at -30.988,-38.684 h0.76
  text "+" at -11.938,-41.885 h0.76 r180
Mechanical 1:
  lines w0.152: -49.901,32.406 cw(c0,0) -32.253,50 32.253,50 cw(c0,0) 49.894,32.416 ; -49.894,-32.416 ccw(c0,0) -32.253,-50 32.253,-50 ccw(c0,0) 49.896,-32.413 ; -49.886,-32.41 -49.886,32.406 ; 49.886,-32.406 49.886,32.41
  lines w0.254: 204,-50 304,-50 304,50 204,50 204,-50